# Altium PCB PCB1.PcbDoc (part 4 of 4)
Units mil, origin at the board's own origin, x right, y up, seen from the top; angles counter-clockwise.
Board outline 7000 x 4400 mil, 4 copper layers (Top Layer, Layer 1, Layer 2, Bottom Layer), stack 23.756 mil thick; 175 components, 152 nets, 661 pads, 40 vias.
Unrouted connection lines stored in the file: 277.
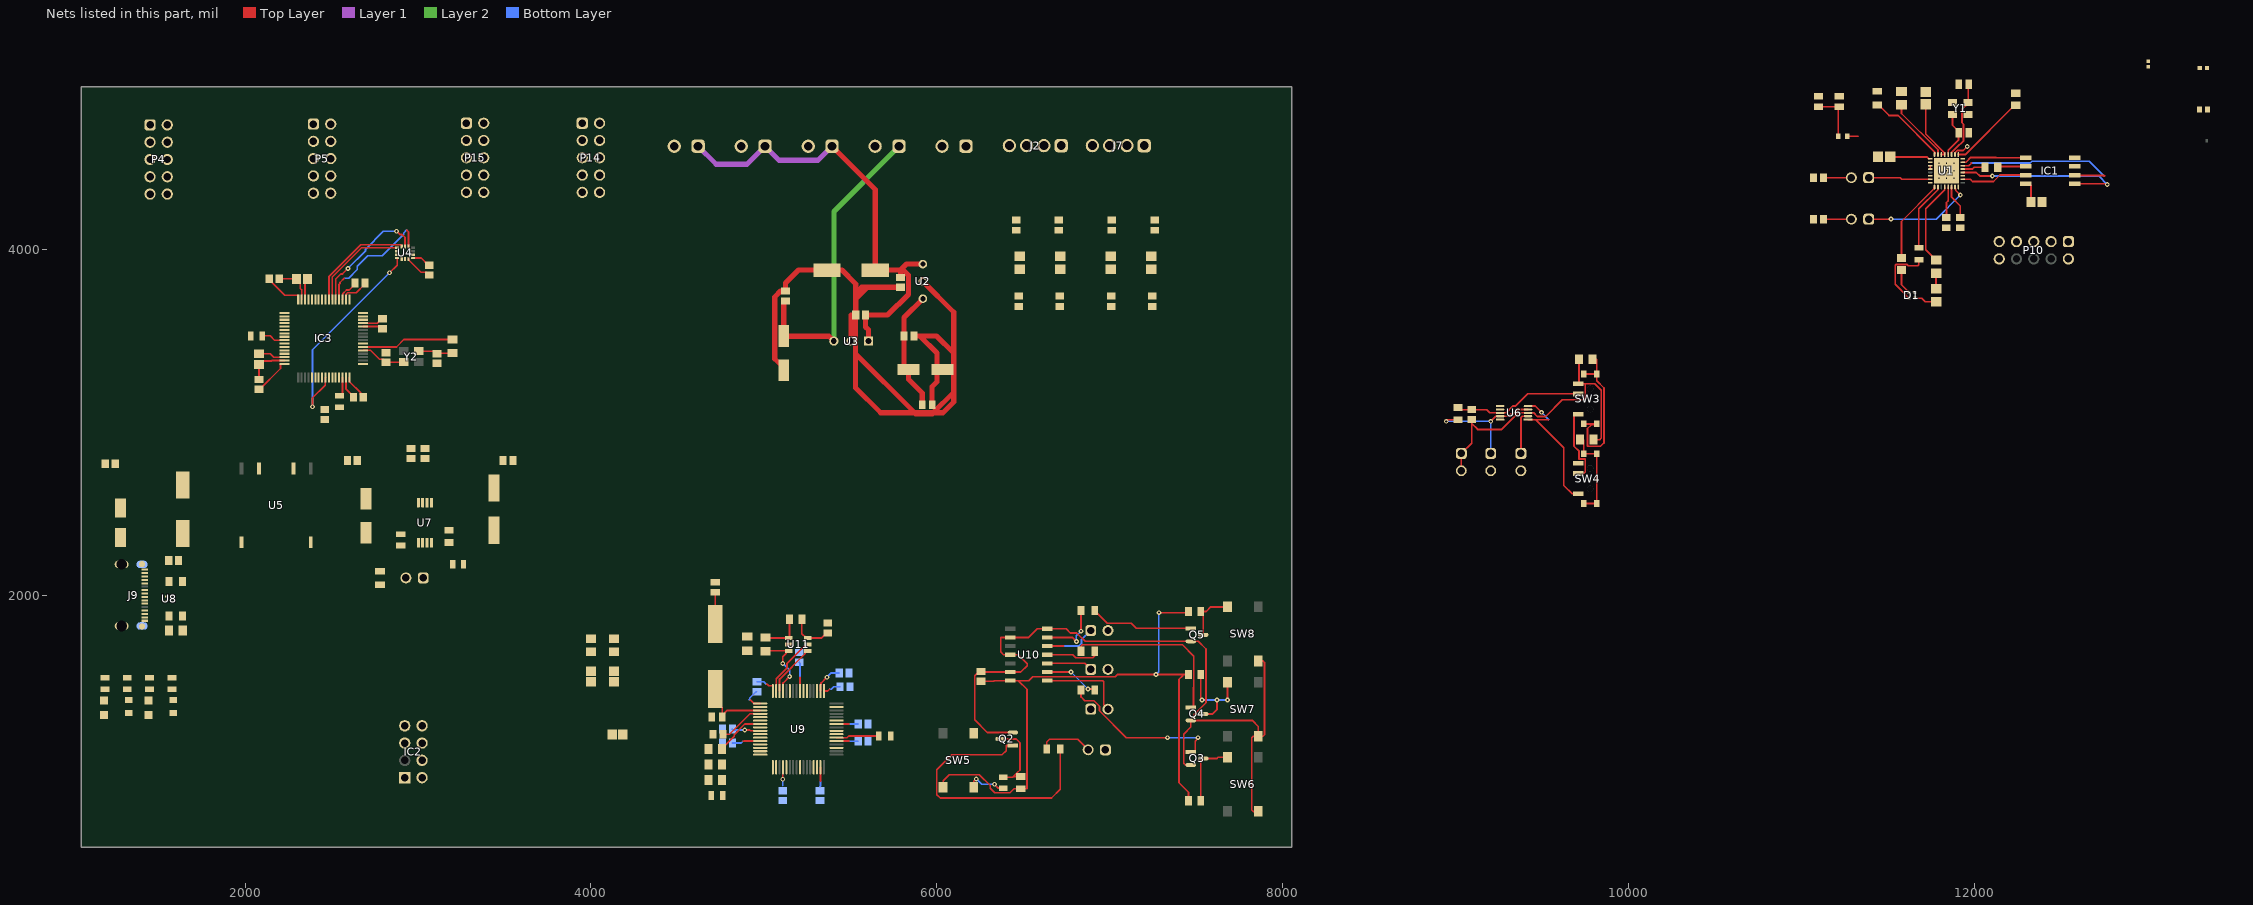
[diagram p4: the nets of this part, all layers, seen from the top]

## Silkscreen, mask and mechanical layers (free items; w line width, h text height) (continued)
Top Overlay: (continued)
  text "CH1" at 7230,4795 h40 r90
  text "GND" at 5285,4790 h40 r90
  text "GND" at 6055,4790 h40 r90
  text "CH1" at 6740,4790 h40 r90
  text "5V" at 7015,4790 h40 r90
  text "CH2" at 7125,4790 h40 r90
  text "5V" at 6525,4785 h40 r90
  text "CH2" at 6635,4785 h40 r90
  text "GND" at 6910,4785 h40 r90
  text "GND" at 6420,4780 h40 r90
  text "3V3" at 1105,4710 h40
  text "3V3" at 2605,4705 h40
  text "3V3" at 3000,4705 h40
  text "3V3" at 3490,4705 h40
  text "3V3" at 1655,4700 h40
  text "3V3" at 2040,4700 h40
  text "GND" at 3740,4700 h40
  text "GND" at 4145,4695 h40
  text "I2C SCK" at 1105,4610 h40
  text "UART5 RX" at 2605,4605 h40
  text "NRST" at 3000,4605 h40
  text "RX" at 3490,4605 h40
  text "I2C SDA" at 1655,4600 h40
  text "I2C SCK" at 2040,4600 h40
  text "IN2" at 3740,4600 h40
  text "IN4" at 4145,4595 h40
  text "SPI CS" at 1105,4515 h40
  text "UART5 TX" at 2605,4510 h40
  text "Boot0" at 3000,4510 h40
  text "PB1" at 3490,4510 h40
  text "I2C SDA" at 2040,4505 h40
  text "IN1" at 3740,4505 h40
  text "SPI MISO" at 1655,4500 h40
  text "IN3" at 4145,4500 h40
  text "SPI SCK" at 1105,4410 h40
  text "AIN 17" at 2605,4405 h40
  text "TX" at 3000,4405 h40
  text "PB0" at 3490,4405 h40
  text "SPI MOSI" at 1655,4400 h40
  text "AIN 16" at 2040,4400 h40
  text "ENA" at 3740,4400 h40
  text "ENB" at 4145,4395 h40
  text "GND" at 1105,4315 h40
  text "GND" at 2605,4310 h40
  text "GND" at 3000,4310 h40
  text "GND" at 3490,4310 h40
  text "GND" at 2040,4305 h40
  text "3V3" at 3740,4305 h40
  text "GND" at 1655,4300 h40
  text "3V3" at 4145,4300 h40
  text "Motor 2" at 6870,4300 h60
  text "Motor 1" at 6380,4290 h60
  text "PWR" at 4980,4080 h90
  text "STM32" at 1230,4025 h90
  text "PWR" at 3365,1805 h90
Mechanical 1:
  the board outline again, w10

## Text inside footprints (layer, text, board x,y; h text height)
U5: Top 3D Body "*" at 1934,2339.5 h0 r90; Top Overlay "*" at 1963,2284.5 h0 r90